# Altium PCB DVT-LPF.PcbDoc
Units mm, origin at the board's own origin, x right, y up, seen from the top; angles counter-clockwise.
Board outline 60 x 45 mm, 2 copper layers (Top Layer, Bottom Layer); 28 components, 14 nets, 64 pads, 2 vias.
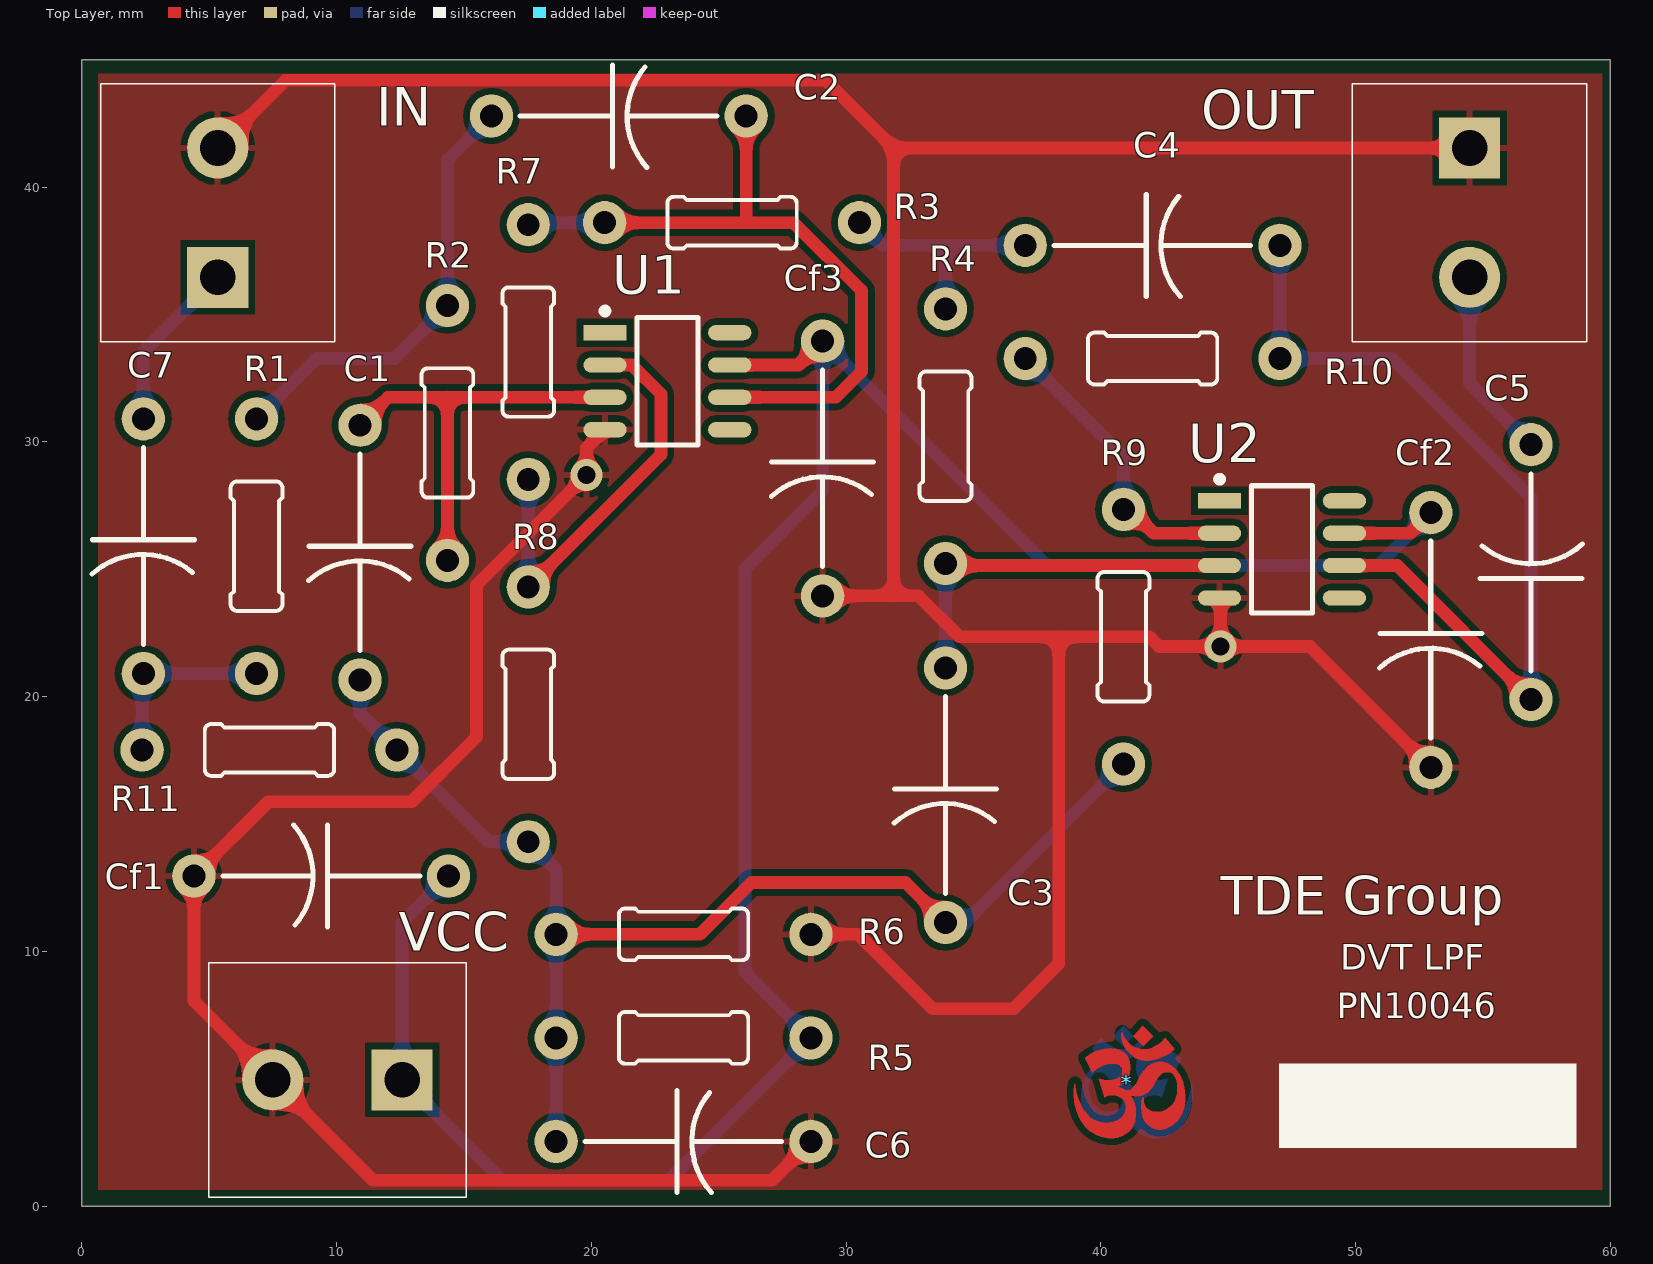
[diagram p0: Top Layer view]
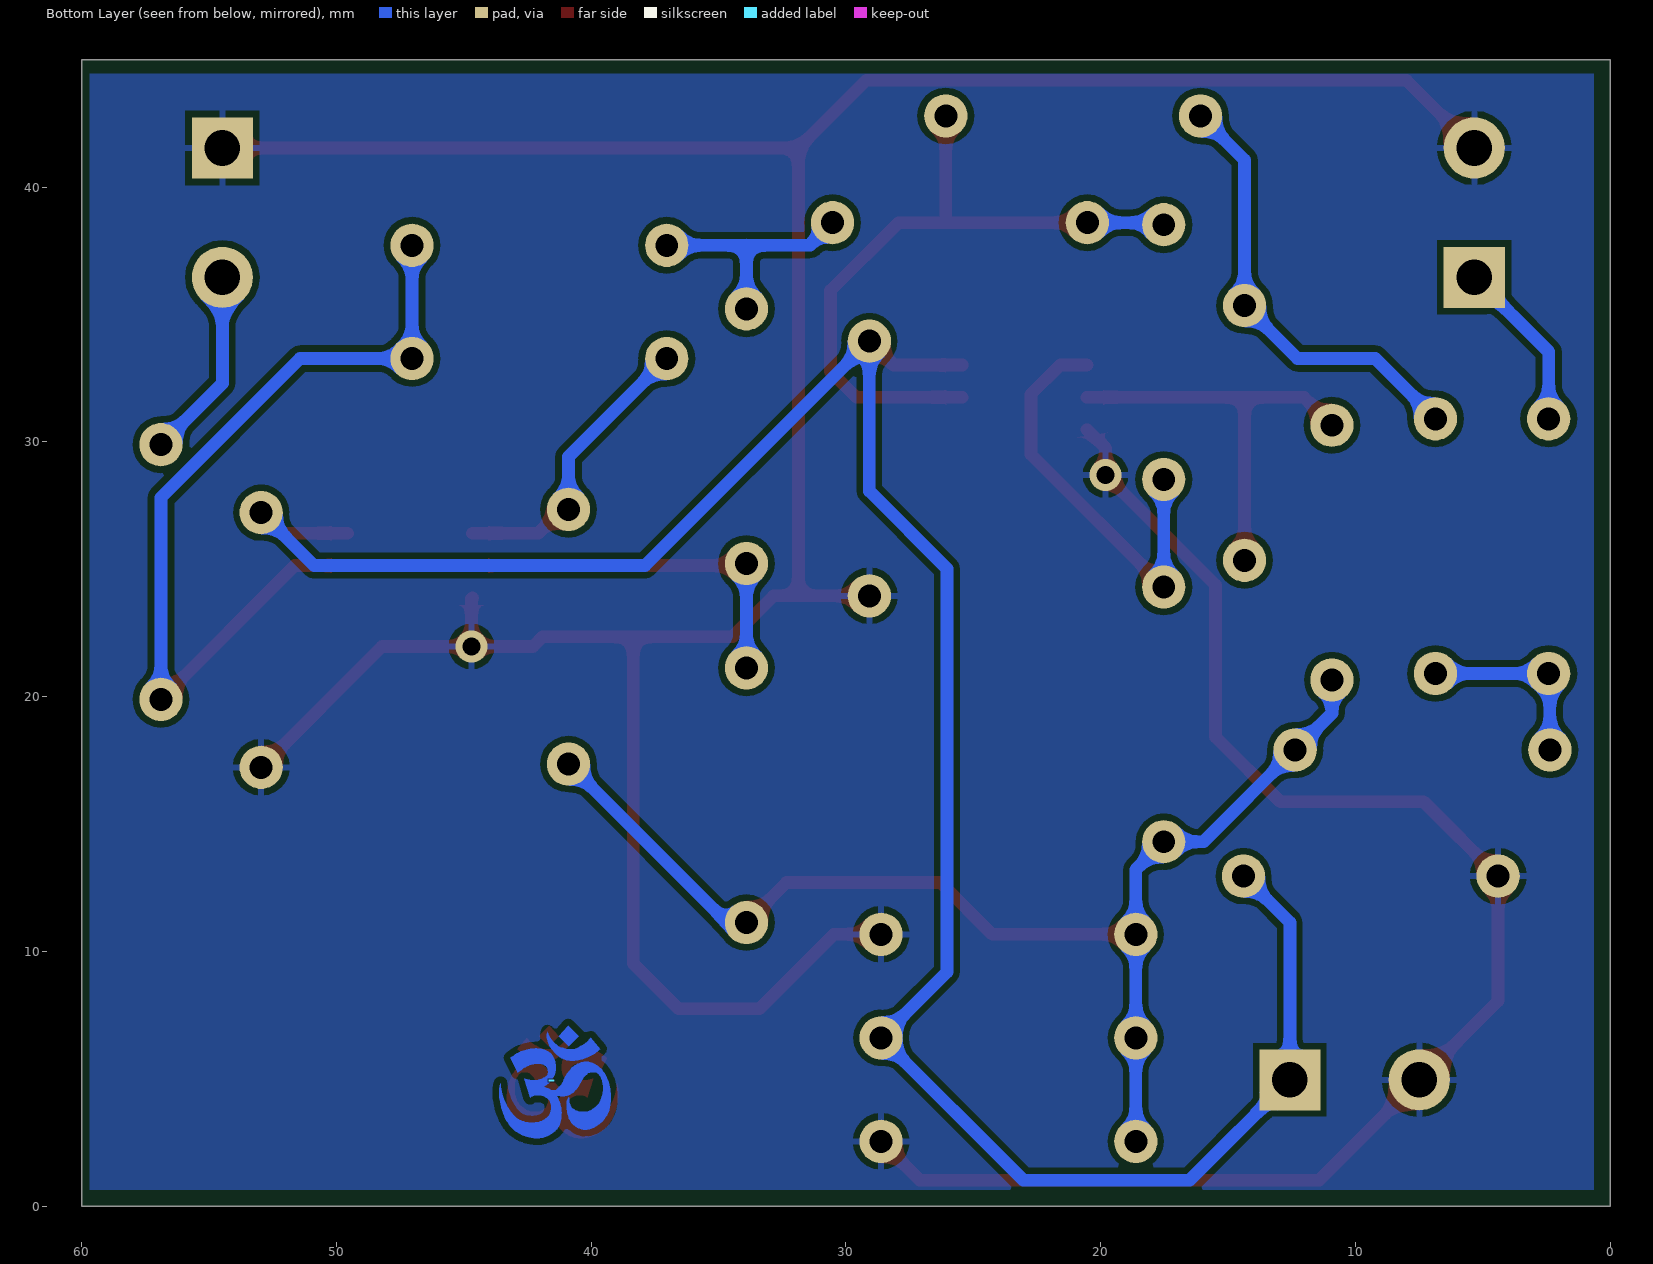
[diagram p1: Bottom Layer view, seen from below]

## Layer stack, top to bottom
Top Solder: solder mask 0.0102, Solder Resist, Dk 3.5
Top Layer: signal copper 0.0356
Dielectric 1: dielectric 0.32, FR-4, Dk 4.8
Bottom Layer: signal copper 0.0356
Bottom Solder: solder mask 0.0102, Solder Resist, Dk 3.5

## Board outline
0,0 60,0 60,45 0,45

## Design rules (kind name [scope] priority, off if disabled: settings)
Clearance Polygons [InPolygon] p1: gap=0.254
Clearance [All] p2: gap=0.15
MinimumSolderMaskSliver [All] p1: minsoldermaskwidth=0.1
PolygonConnect [All] p1: connectstyle=Relief reliefconductorwidth=0.254 reliefentries=4 polygonreliefangle="90 Angle" airgapwidth=0.254
RoomDefinition DVT-LPF [InComponentClass('DVT-LPF')] p1: confinementstyle=ConfineIn formatcopy=TRUE lockcomponents=FALSE outline -3.302,-7.747 67.437,-7.747 67.437,48.768 -3.302,48.768
RoutingVias [All] p1: holewidth=0.711 width=1.27 viastyle="Through Hole" minholewidth=0 minwidth=0 maxholewidth=0.711 maxwidth=1.27
SilkToSilkClearance [All] p1: silktosilkclearance=0.1
SilkToSolderMaskClearance [IsPad] p1: minsilkscreentomaskgap=0.1 clearancetoexposedcopper=TRUE
SolderMaskExpansion [All] p1: expansion=0.102
Width [All] p1: maxlimit=4 minlimit=0.254 preferedwidth=0.5
27 further rules are at their usual default settings.

## Components (designator, comment, footprint, x,y, rotation, side; value= is the part's Value field where it differs from the comment)
* "Om" Om-5mm 41.021,4.826 r0 top
- "Om" Om-5mm 41.529,4.826 r180 bottom
C1 "Capacitor-Dummy-THT" Dummy-10mm 10.922,25.654 r270 top
C2 "Capacitor-Dummy-THT" Dummy-10mm 21.082,42.799 r0 top
C3 "Capacitor-Dummy-THT" Dummy-10mm 33.909,16.129 r270 top
C4 "Capacitor-Dummy-THT" Dummy-10mm 42.037,37.719 r0 top
C5 "Capacitor-Dummy-THT" Dummy-10mm 56.896,24.892 r90 top
C6 "Capacitor-Dummy-THT" Dummy-10mm 23.622,2.54 r0 top
C7 "Capacitor-Dummy-THT" Dummy-10mm 2.413,25.908 r270 top
Cf1 "Capacitor-Dummy-THT" Dummy-10mm 9.398,12.954 r180 top
Cf2 "Capacitor-Dummy-THT" Dummy-10mm 52.959,22.225 r270 top
Cf3 "Capacitor-Dummy-THT" Dummy-10mm 29.083,28.956 r270 top
IN "PHOENIX_1715721" Phoenix-2-5_08 5.334,39 r90 top
OUT "PHOENIX_1715721" Phoenix-2-5_08 54.483,39 r270 top
R1 "Resistor-Dummy-THT" Dummy-10mm 6.858,25.908 r270 top
R2 "Resistor-Dummy-THT" Dummy-10mm 14.351,30.353 r90 top
R3 "Resistor-Dummy-THT" Dummy-10mm 25.527,38.608 r180 top
R4 "Resistor-Dummy-THT" Dummy-10mm 33.909,30.226 r90 top
R5 "Resistor-Dummy-THT" Dummy-10mm 23.622,6.604 r0 top
R6 "Resistor-Dummy-THT" Dummy-10mm 23.622,10.668 r180 top
R7 "Resistor-Dummy-THT" Dummy-10mm 17.526,33.528 r270 top
R8 "Resistor-Dummy-THT" Dummy-10mm 17.526,19.304 r270 top
R9 "Resistor-Dummy-THT" Dummy-10mm 40.894,22.352 r270 top
R10 "Resistor-Dummy-THT" Dummy-10mm 42.037,33.274 r180 top
R11 "Resistor-Dummy-THT" Dummy-10mm 7.366,17.907 r180 top
U1 "OPA820ID" SOP8_L 22.987,32.385 r0 top
U2 "OPA820ID" SOP8_L 47.117,25.781 r0 top
VCC "PHOENIX_1715721" Phoenix-2-5_08 10.033,4.953 r180 top

## Footprints (in the part's own frame and the unit in brackets; to place one, negate y for a bottom-side part, rotate by r counter-clockwise, add the part's x,y. Pads: shape width x height; smd on the part's side, far side on the other; paste and mask are expansions set on the pad)
Dummy-10mm [mm] "Dummy-10mm"
  round 1.7 hole 0.9: 1(-5,0) 2(5,0)
  silkscreen extent -3.88,-2.01 3.85,2, body extent -2.39,-0.88 2.41,0.88, height 1.87
Om-5mm [mm]
  Top Layer region: 539 vertices and 0 holes, not listed, extent -2.085,-2.163 2.295,1.363
  Top Layer region: 0.625,2.26 1.04,1.845 0.645,1.45 0.255,1.84
  Top Layer region: -0.185,2.025 -0.21,1.935 -0.21,1.78 -0.165,1.59 -0.095,1.43 -0.01,1.31 0.09,1.185 0.18,1.105 0.27,1.03 0.34,0.985 0.445,0.94 0.555,0.905 0.68,0.885 0.77,0.88 0.88,0.885 1.01,0.9 1.185,0.94 1.385,1.01 1.555,1.09 1.665,1.16 1.82,1.285 1.88,1.34 1.51,1.78 1.455,1.715 1.39,1.645 1.29,1.565 1.21,1.51 1.125,1.46 1.005,1.395 0.89,1.36 0.8,1.34 0.72,1.34 0.62,1.34 0.525,1.355 0.42,1.38 0.32,1.415 0.235,1.455 0.165,1.5 0.095,1.56 0.04,1.62 -0.025,1.7 -0.085,1.79 -0.13,1.87 -0.155,1.945
Phoenix-2-5_08 [mm] "Phoenix, 1715721"
  rect 2.4x2.4 hole 1.4: 1(-2.54,0)
  round 2.4 hole 1.4: 2(2.54,0)
  silkscreen extent -5.06,-4.6 5.06,4.6, body extent -5.05,-5.19 5.85,4.61, height 14.2
SOP8_L [mm] "SOIC, 8-Leads, Body 4.9x3.9mm, Pitch 1.27mm, IPC High Density"
  rect 1.7x0.6 smd: 1(-2.45,1.905)
  oval 1.7x0.6 smd: 2(-2.45,0.635) 3(-2.45,-0.635) 4(-2.45,-1.905) 5(2.45,-1.905) 6(2.45,-0.635) 7(2.45,0.635) 8(2.45,1.905)
  silkscreen extent -2.57,-2.5 1.2,2.88, body extent -3,-2.54 3,2.54, height 1.7

## Part data
IN OUT VCC: library part 2Pol_1715721, "Phoenix, 2 pol, 5.08mm, 22A, 715721"
U1 U2: "High speed OP, 260MHz"

## Via types
v1: diameter 1.27, hole 0.711, Top Layer to Bottom Layer, 2 vias

## Nets (pads, with @x,y where several pads share a name; then routed paths per layer and width w, separated by ;. In a path a pad name is that pad's centre, name@x,y a point inside that pad or via, vN(x,y) a via of type N, cw(c..) or ccw(c..) an arc to the next point about the centre after c; other vN are vias at no path point)
GND: C6.2 Cf1.2 Cf2.2 Cf3.2 IN.2 OUT.1 R6.1 U1.4 U2.4 VCC.2 | length 182.2
  Top Layer w0.5: IN.2 7.99,44.196 29.21,44.196 31.866,41.54 ; U1.4 19.812,29.755 v1(19.812,28.702) 15.494,24.384 15.494,18.415 12.954,15.875 7.319,15.875 Cf1.2 4.398,8.048 VCC.2 11.43,1.016 27.098,1.016 C6.2 ; R6.1 30.48,10.668 33.401,7.747 36.576,7.747 38.354,9.525 38.354,22.352 ; Cf3.2 32.85,23.956 34.454,22.352 38.354,22.352 ; 31.866,23.956 31.866,41.54 ; U2.4 44.704,23.839 v1(44.704,21.971) ; Cf2.2 48.213,21.971 v1(44.704,21.971) ; OUT.1 31.866,41.54 ; 38.354,22.352 41.91,22.352 42.291,21.971 v1(44.704,21.971)
NetC1_1: C1.1 R2.1 U1.3 | length 16.5
  Top Layer w0.5: C1.1 12.018,31.75 14.351,31.75 ; R2.1 14.351,31.75 ; U1.3 14.351,31.75
NetC2_1: C2.1 R1.1 R2.2 | length 17.5
  Bottom Layer w0.5: R1.1 9.224,33.274 12.272,33.274 R2.2 14.351,41.068 C2.1
NetC2_2: C2.2 R3.2 R7.1 U1.6 | length 27.1
  Top Layer w0.5: R3.2 27.94,38.608 30.607,35.941 30.607,32.766 29.591,31.75 U1.6 ; 26.082,38.688 C2.2
  Bottom Layer w0.5: R7.1 17.606,38.608 R3.2
NetC3_1: C3.1 R4.1 U2.3 | length 14.9
  Top Layer w0.5: R4.1 33.989,25.146 U2.3
  Bottom Layer w0.5: C3.1 R4.1
NetC4_1: C4.1 R3.1 R4.2 | length 9.4
  Bottom Layer w0.5: R3.1 31.416,37.719 33.909,37.719 ; R4.2 33.909,37.719 ; C4.1 33.909,37.719
NetC4_2: C4.2 C5.1 R10.1 U2.6 | length 34
  Top Layer w0.5: U2.6 51.642,25.146 C5.1
  Bottom Layer w0.5: C4.2 R10.1 51.435,33.274 56.896,27.813 C5.1
NetC5_2: C5.2 OUT.2 | length 7.6
  Bottom Layer w0.5: OUT.2 54.483,32.305 C5.2
NetC7_1: C7.1 IN.1 | length 6.8
  Bottom Layer w0.5: C7.1 2.413,33.539 IN.1
NetC7_2: C7.2 R1.2 R11.2 | length 7.5
  Bottom Layer w0.5: R11.2 2.366,20.861 C7.2 R1.2
NetR7_2: R7.2 R8.1 U1.2 | length 16.6
  Top Layer w0.5: R8.1 22.733,29.511 22.733,31.877 21.59,33.02 U1.2
  Bottom Layer w0.5: R8.1 R7.2
NetR9_1: R9.1 R10.2 U2.2 | length 11.4
  Top Layer w0.5: R9.1@41.148,27.352 42.084,26.416 U2.2
  Bottom Layer w0.5: R10.2 40.894,29.417 R9.1
VCC: Cf1.1 Cf2.1 Cf3.1 R5.2 U1.7 U2.7 VCC.1 | length 94.6
  Top Layer w0.5: U1.7 28.147,33.02 Cf3.1 ; U2.7 52.15,26.416 Cf2.1
  Bottom Layer w0.5: Cf1.1 12.573,11.129 VCC.1 16.51,1.016 23.034,1.016 R5.2 26.035,9.191 26.035,25.019 29.083,28.067 Cf3.1 37.893,25.146 50.88,25.146 Cf2.1
VREF: C1.2 C3.2 C6.1 R5.1 R6.2 R8.2 R9.2 R11.1 | length 48.6
  Top Layer w0.5: R6.2 24.257,10.668 26.289,12.7 32.338,12.7 C3.2
  Bottom Layer w0.5: C1.2 10.922,19.351 R11.1 15.969,14.304 R8.2 18.622,13.208 R6.2 R5.1 C6.1 ; C3.2 34.671,11.129 R9.2
pads on no net: U1.1 U1.5 U1.8 U2.1 U2.5 U2.8

## Polygon pours and split planes (outlines as drawn)
GND on Bottom Layer "GND-1" (solid, pour order 0): 0.635,0.635 59.69,0.635 59.69,44.45 0.635,44.45
GND on Top Layer "GND" (solid, pour order 2): 0.635,44.45 59.69,44.45 59.69,0.635 0.635,0.635

## Silkscreen, mask and mechanical layers (free items; w line width, h text height)
Top Overlay:
  rectangle: 46.99,2.286 58.674,5.588
  text "TDE Group" at 44.704,11.43 h1.5
  text "DVT LPF" at 49.403,9.271 h1
  text "PN10046" at 49.276,7.366 h1
Outline:
  the board outline again, w0.5

## Dimensions
60,0 to 60,45 on Mechanical 16
0,0 to 60,0 on Mechanical 16